# Altium PCB PCB1.PcbDoc
Units mm, origin at the board's own origin, x right, y up, seen from the top; angles counter-clockwise.
Board outline 43.05 x 44.07 mm, 4 copper layers (SIGNAL, GND, POWER, SIGNAL II), stack 0.603 mm thick; 62 components, 41 nets, 254 pads, 28 vias.
Unrouted connection lines stored in the file: 72.
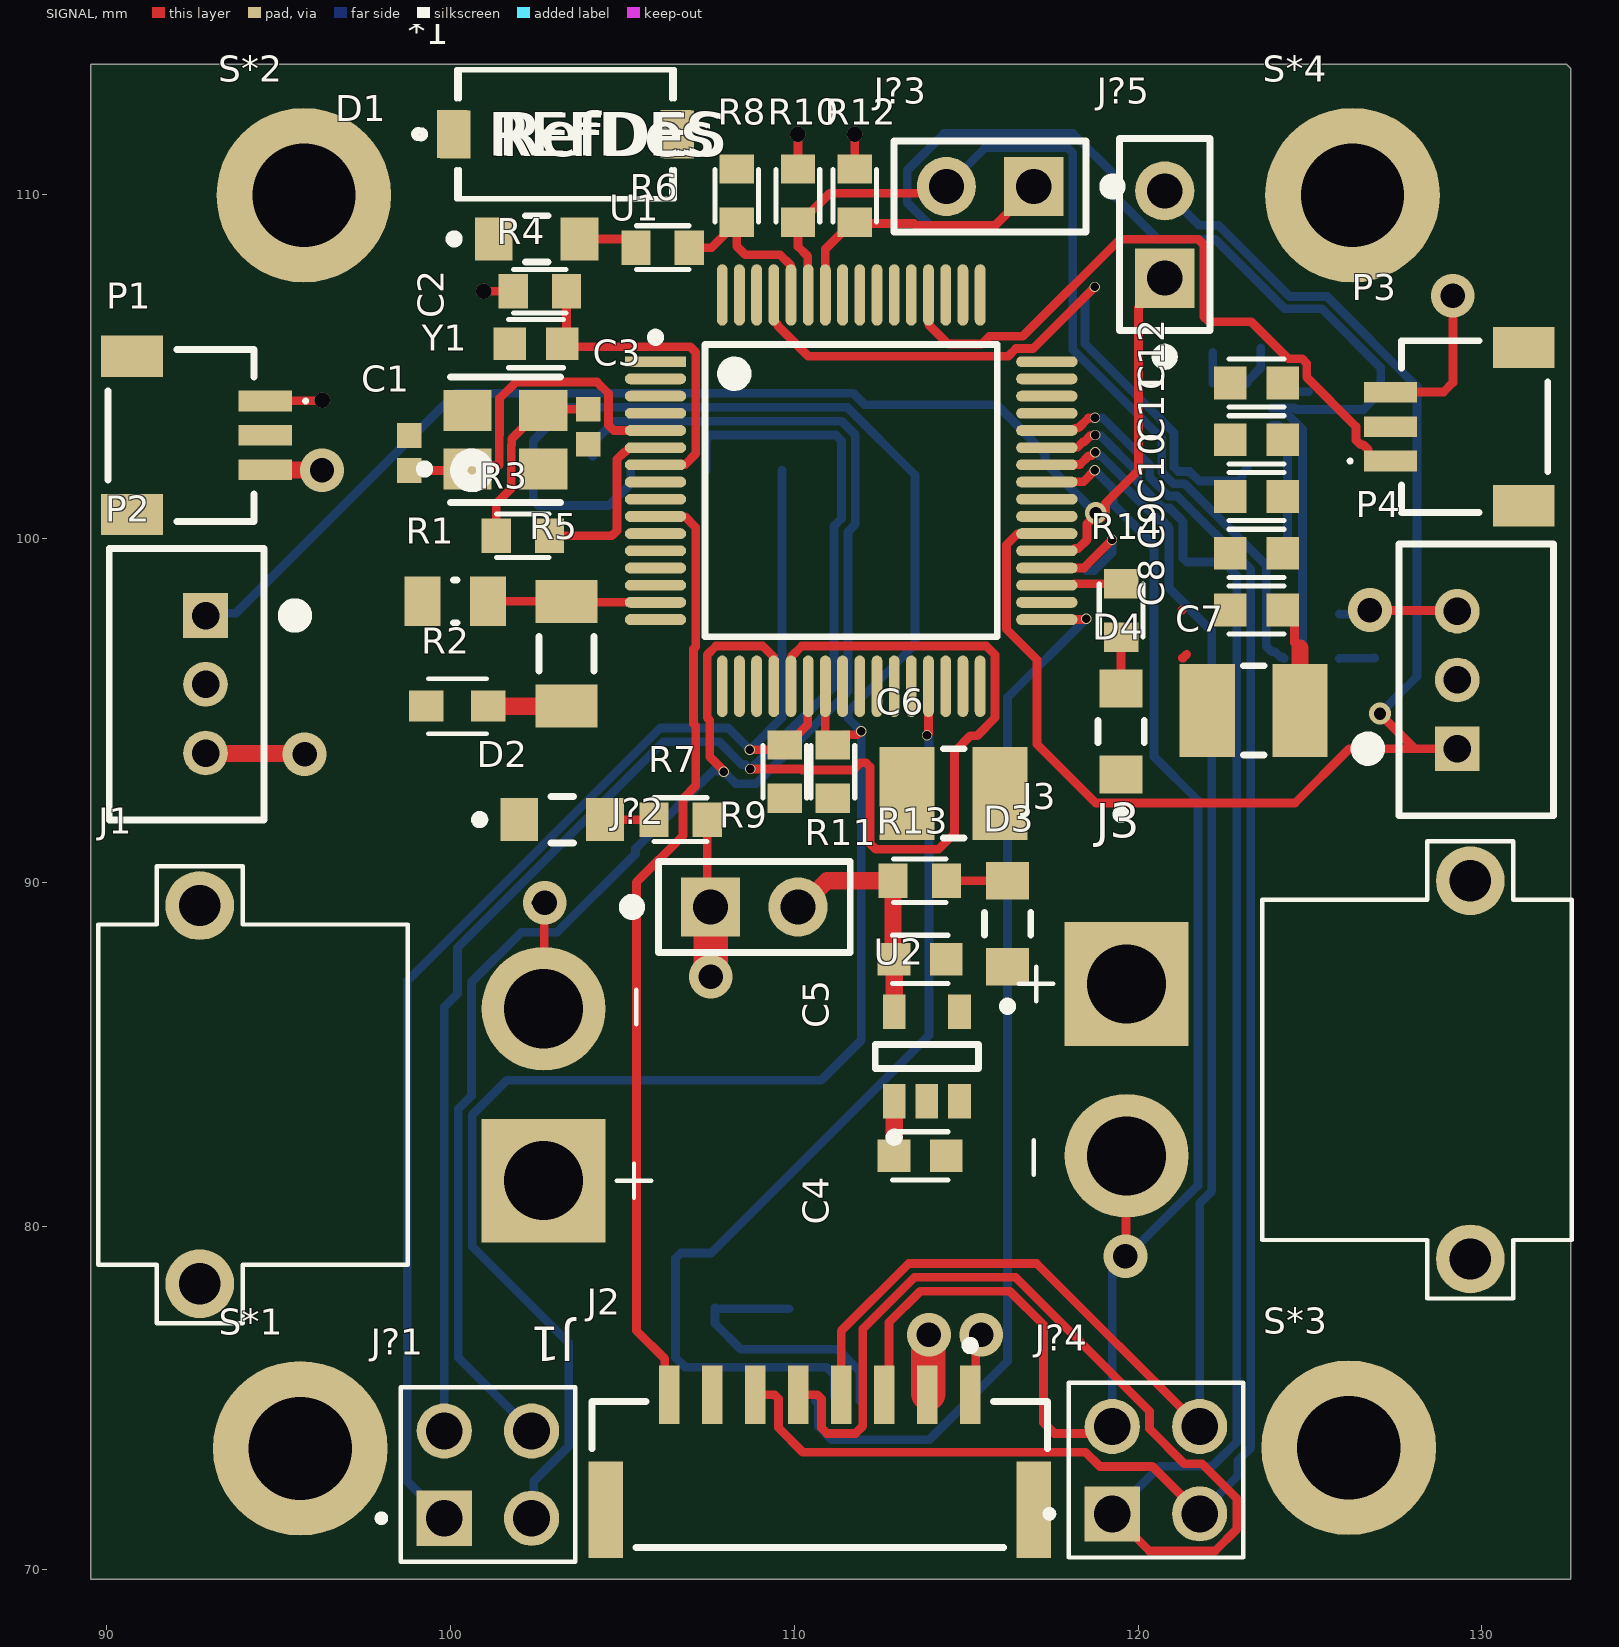
[diagram p0: SIGNAL view]
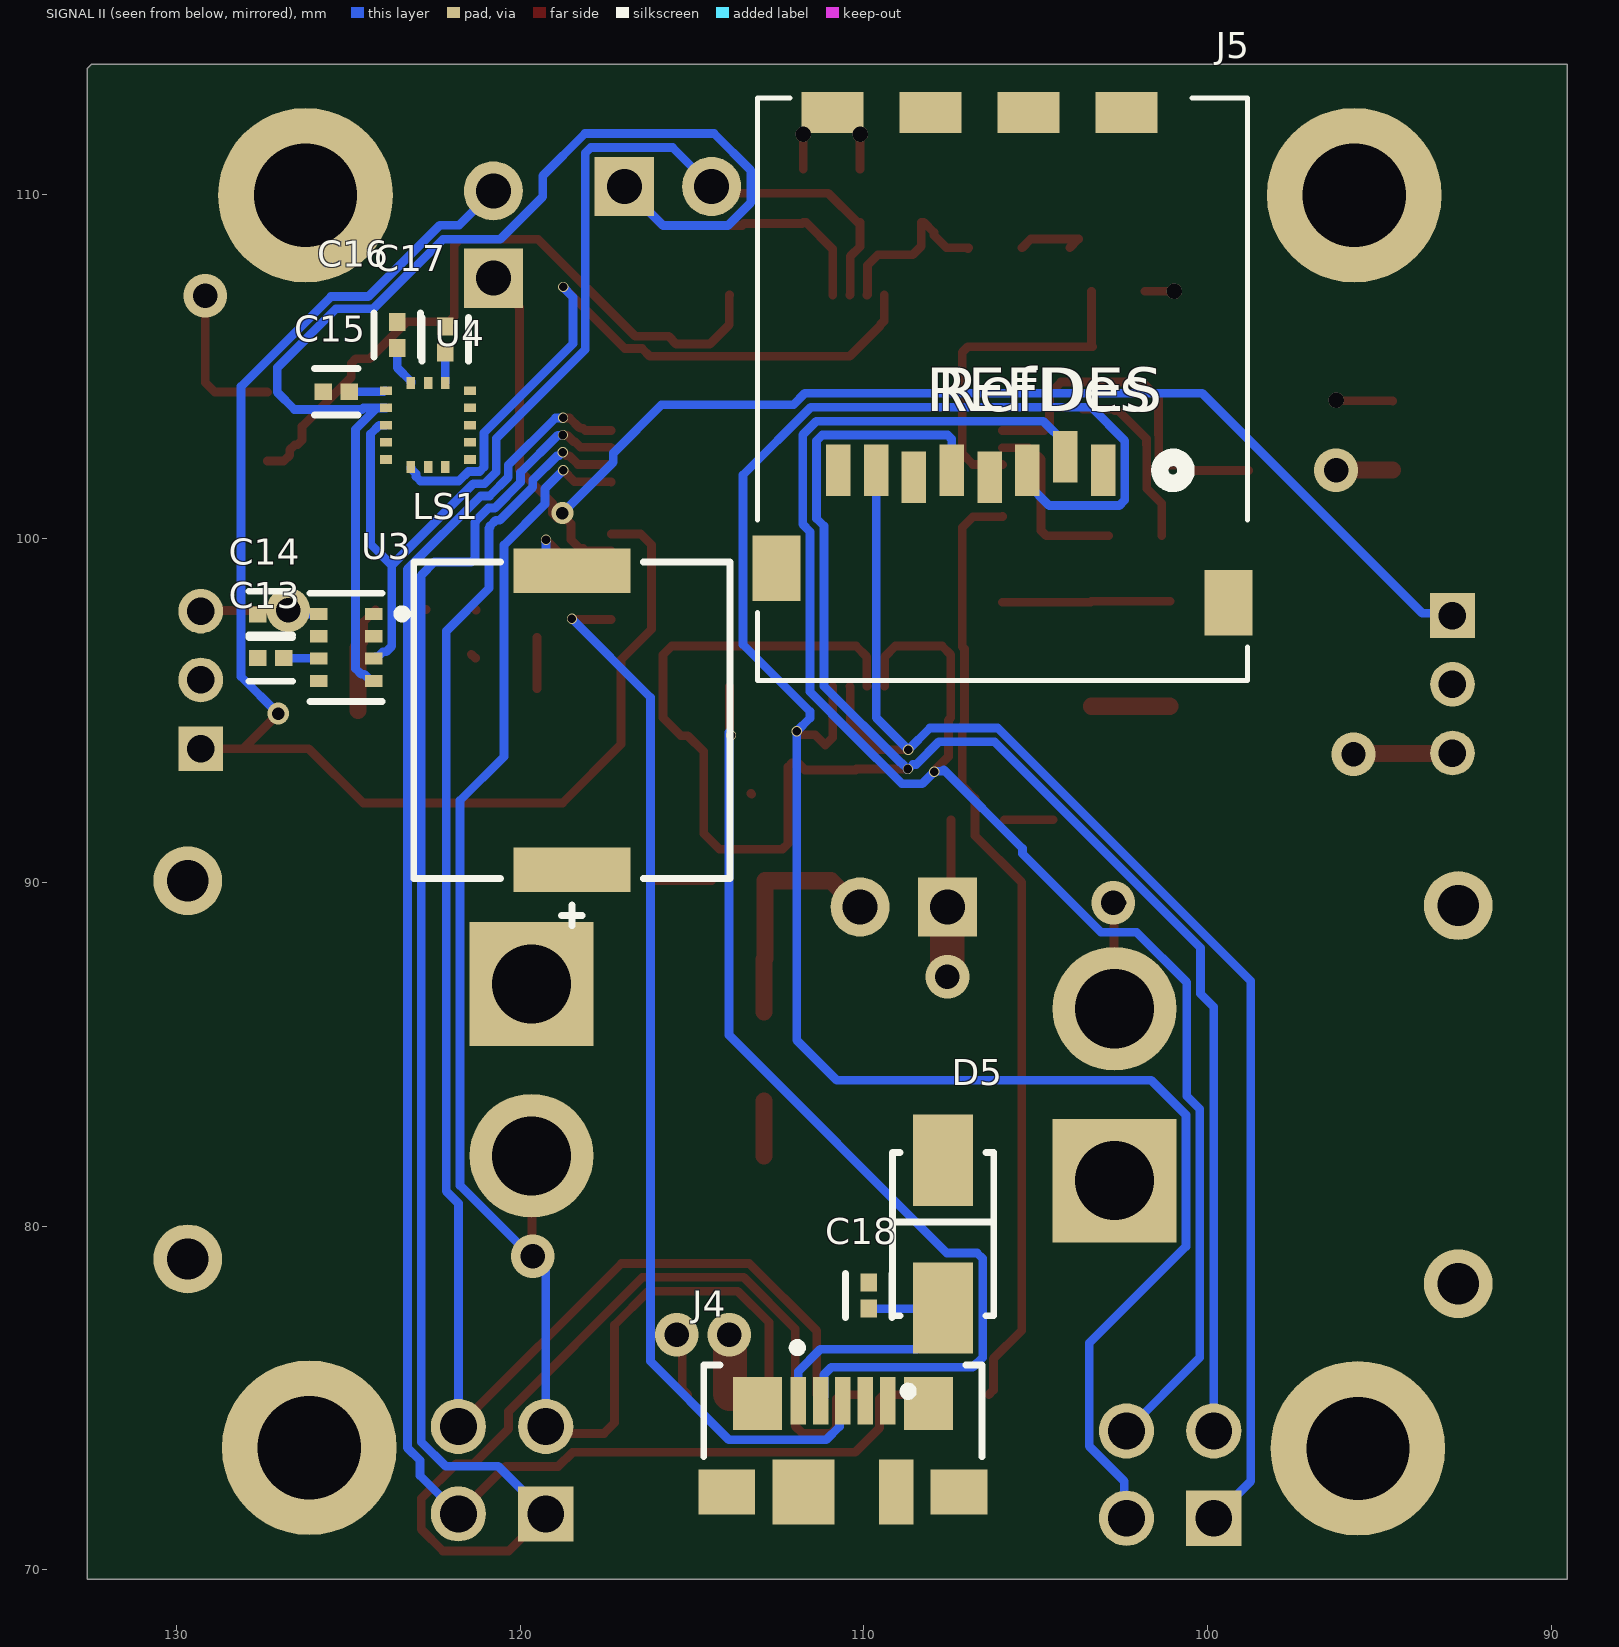
[diagram p1: SIGNAL II view, seen from below]
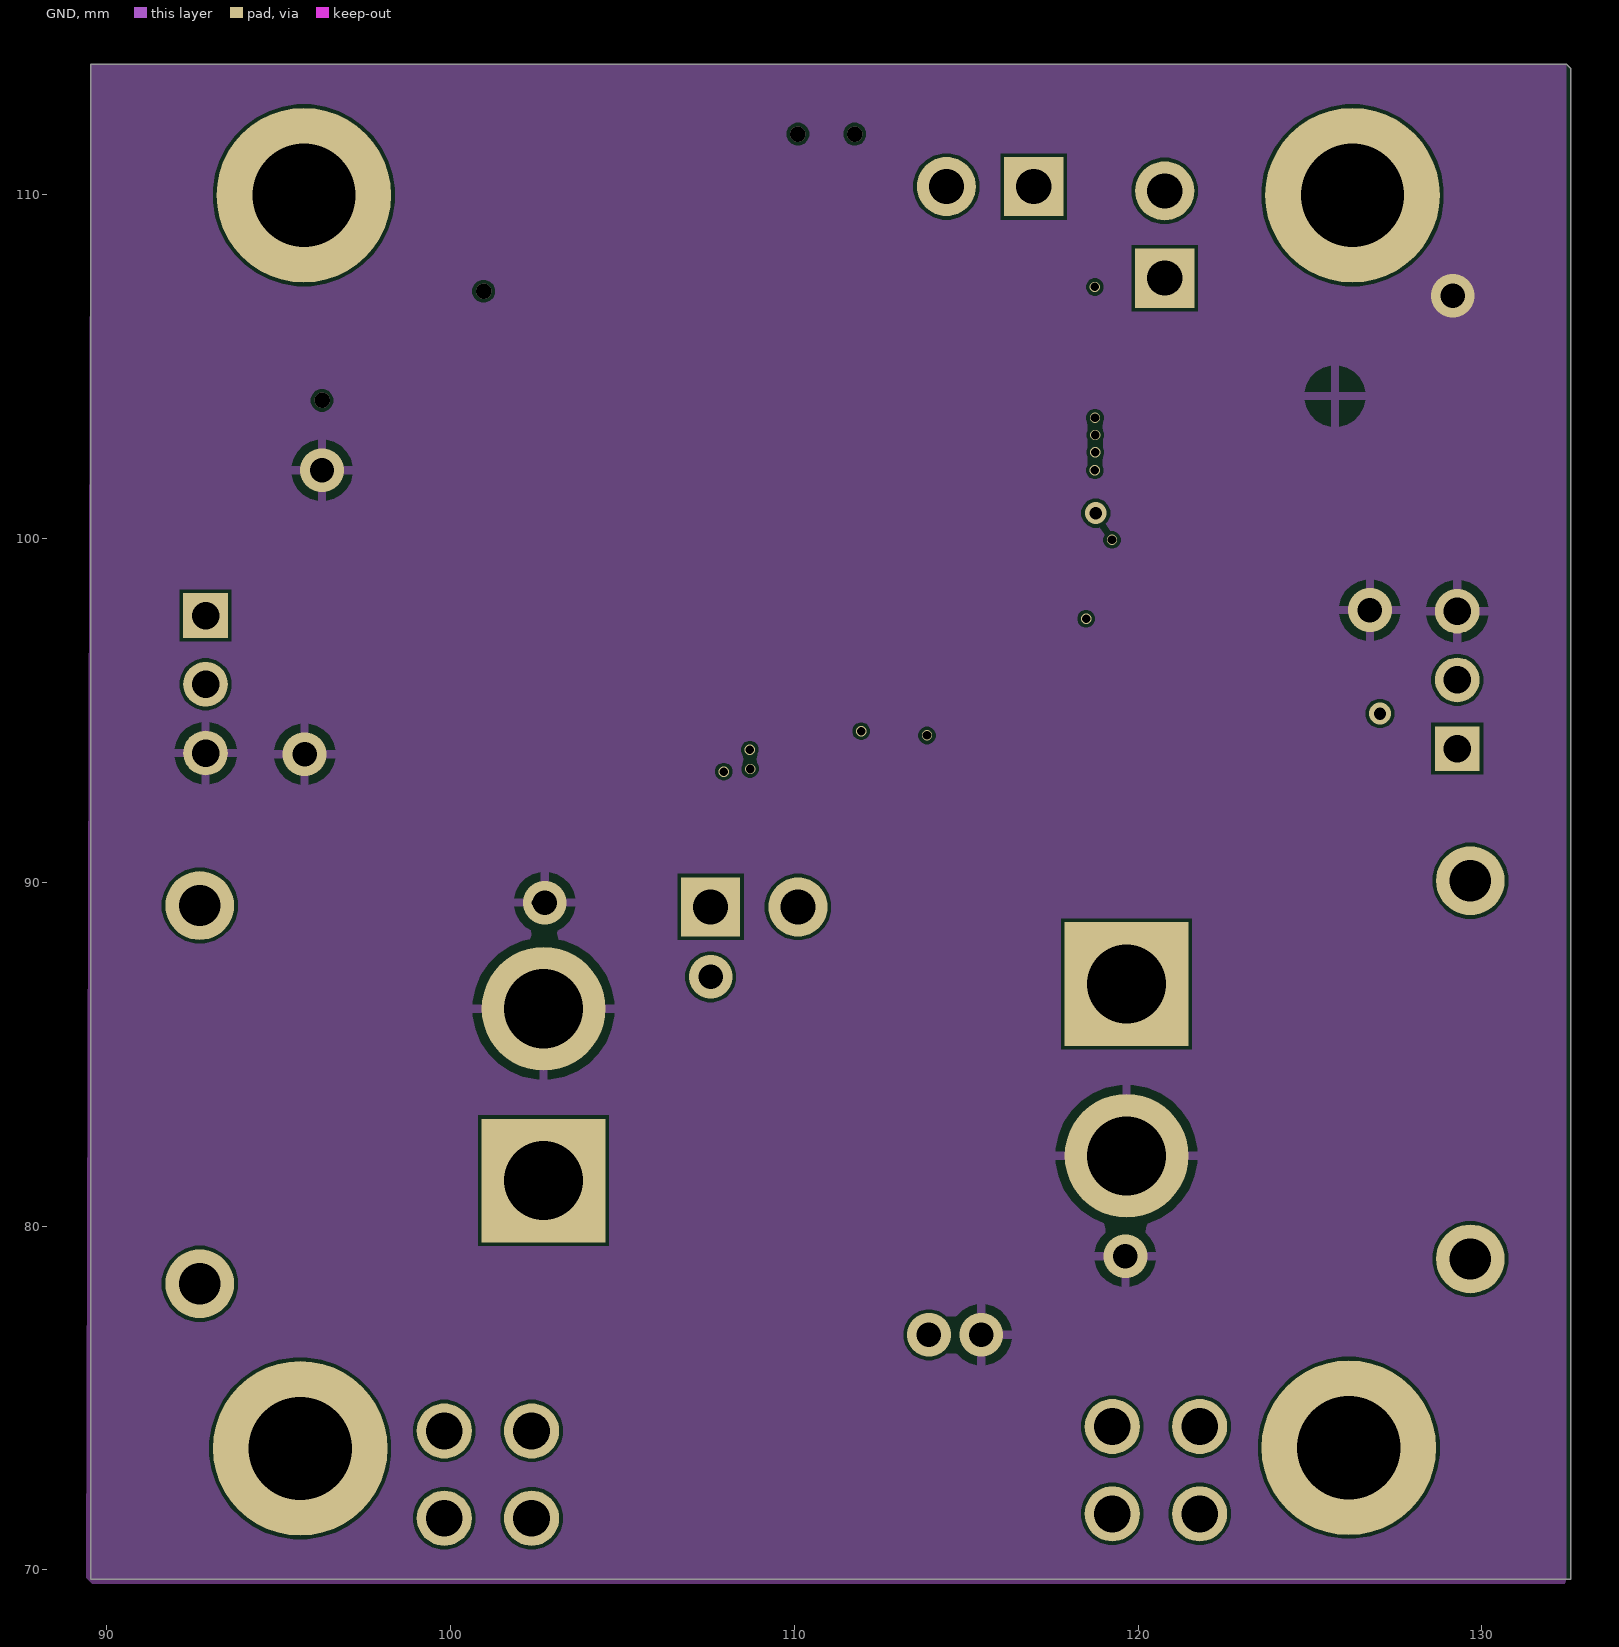
[diagram p2: GND]
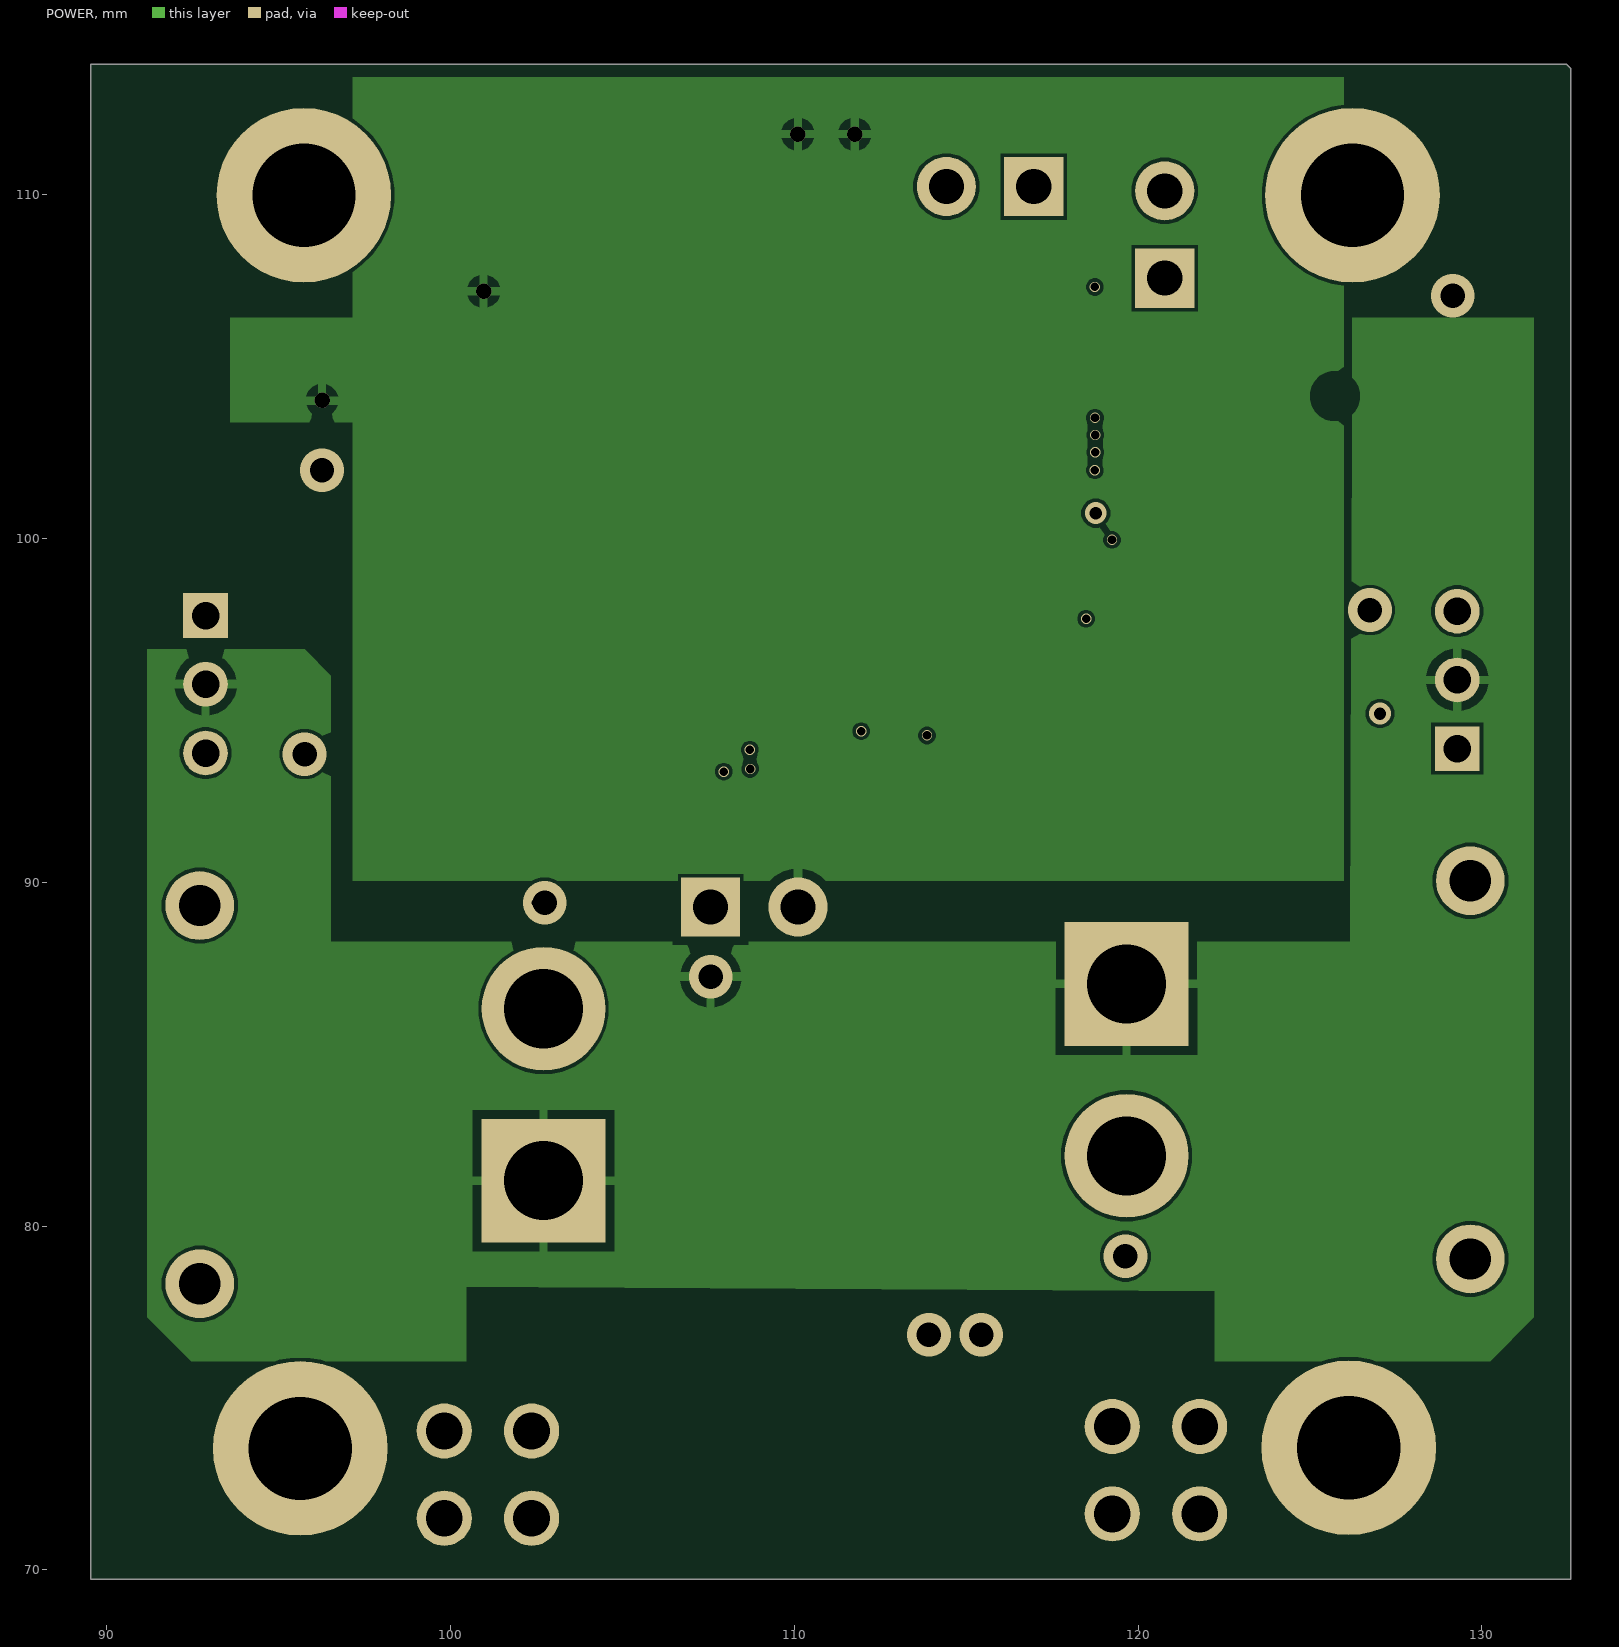
[diagram p3: POWER]

## Layer stack, top to bottom
Top Solder: solder mask 0.0102, Solder Resist, Dk 3.5
SIGNAL: signal copper 0.0356
Dielectric 2: prepreg 0.0711, PP-006, Dk 4.1
GND: signal copper 0.035
Dielectric 1: dielectric 0.32, FR-4, Dk 4.8
POWER: signal copper 0.035
Dielectric 3: prepreg 0.0711, PP-006, Dk 4.1
SIGNAL II: signal copper 0.0356
Bottom Solder: solder mask 0.0102, Solder Resist, Dk 3.5

## Board outline
89.535,113.792 132.461,113.792 132.588,113.665 132.588,69.723 89.535,69.723

## Design rules (kind name [scope] priority, off if disabled: settings)
Clearance Clearance_1 [(ExistsOnLayer('GND') Or ExistsOnLayer('POWER')) vs (ExistsOnLayer('GND') Or ExistsOnLayer('POWER'))] p1: gap=0.1 ignorepadtopadclearanceinfootprint=FALSE sourcerule=37 cellrowname=All cellrowtype=0 cellcolname=All cellcoltype=0 innerlayers=TRUE
Clearance Clearance_2 [(ExistsOnLayer('SIGNAL') Or ExistsOnLayer('SIGNAL II')) vs (ExistsOnLayer('SIGNAL') Or ExistsOnLayer('SIGNAL II'))] p2: gap=0.1 ignorepadtopadclearanceinfootprint=FALSE sourcerule=37 cellrowname=All cellrowtype=0 cellcolname=All cellcoltype=0 outerlayers=TRUE
Clearance [All] p3: gap=0.254 ignorepadtopadclearanceinfootprint=FALSE ismatrix=TRUE
PolygonConnect [All] p1: connectstyle=Relief reliefconductorwidth=0.254 reliefentries=4 polygonreliefangle="90 Angle" airgapwidth=0.254
RoutingVias [All] p1: holewidth=0.711 width=1.27 viastyle="Through Hole" minholewidth=0.711 minwidth=1.27 maxholewidth=0.711 maxwidth=1.27
SolderMaskExpansion [All] p1: expansion=0.102 istentingtop=FALSE
Width MaxMinWidth_1 [All] p1: maxlimit=1 minlimit=0.254 preferedwidth=0.254 minimp=50.000000 maximp=50.000000 favimp=50.000000
Width [All] p2: maxlimit=0.254 minlimit=0.254 preferedwidth=0.254
30 further rules are at their usual default settings.

## Classes and differential pairs
component class Power: C9 C13 C18 D2 D4 D5 J1 R5 R7 R9 R11 R13 R14 U4
component class MCU: *1 C1 C7 C9 C10 C13 D4 LS1 R3 R8 R9 R10 R11 R12 R14 S*2 S*3 S*4 U1 Y1
component class Sensors: C9 C13 C14 C16 U4
component class Connectors: J2 J5 P1 P3 P4

## Components (designator, comment, footprint, x,y, rotation, side; value= is the part's Value field where it differs from the comment)
*1 "PTS636 SM50J SMTR LFS" "PTS636 SM50J SMTR LFS-Footprint-1" 110.542,144.907 r0 top (schematic designator *)
C1 "10pF" CAPC1005X55X25ML05T05 98.806,102.487 r90 top
C2 "100nF" CAP_0603 102.489,105.664 r180 top (schematic designator C10)
C3 "10pF" CAPC1005X55X25ML05T05 104.013,103.249 r270 top (schematic designator C2)
C4 "1uF" CAP_0603 113.665,82.042 r0 top (schematic designator C16)
C5 "1uF" CAP_0603 113.665,87.757 r0 top (schematic designator C17)
C6 "2.2uF" CAP_1210 114.634,92.583 r0 top (schematic designator C9)
C7 "10uF" CAP_1210 123.364,94.996 r180 top (schematic designator C3)
C8 "100nF" CAP_0603 123.444,97.917 r180 top (schematic designator C4)
C9 "100nF" CAP_0603 123.444,99.568 r180 top (schematic designator C5)
C10 "100nF" CAP_0603 123.444,101.219 r180 top (schematic designator C6)
C11 "100nF" CAP_0603 123.444,102.87 r180 top (schematic designator C7)
C12 "100nF" CAP_0603 123.444,104.521 r180 top (schematic designator C8)
C13 "100nF" FP-CL93-IPC_C 127.254,96.52 r0 bottom (schematic designator C12)
C14 "100nF" FP-CL93-IPC_C 127.252,97.79 r0 bottom
C15 "100nF" FP-CL93-IPC_C 125.347,104.267 r180 bottom (schematic designator C13)
C16 "100nF" FP-CL93-IPC_C 123.571,105.918 r90 bottom (schematic designator C15)
C17 "100nF" FP-CL93-IPC_C 122.174,105.789 r90 bottom (schematic designator C11)
C18 "100nF" FP-CL93-IPC_C 109.855,77.98 r90 bottom
D1 "LTST-C171KGKT" FP-LTST-C171KGKT-MFG 102.509,108.712 r0 top (schematic designator D4)
D2 "LTST-C171KGKT" FP-LTST-C171KGKT-MFG 103.251,91.821 r0 top (schematic designator D3)
D3 "LTST-C171KGKT" FP-LTST-C171KGKT-MFG 116.205,88.793 r90 top (schematic designator D5)
D4 "LTST-C171KGKT" FP-LTST-C171KGKT-MFG 119.507,94.381 r90 top (schematic designator D1)
D5 "SCHOTTKY_40Vrm_1A_500mV" FP-403AE-MFG 107.696,79.765 r90 bottom (schematic designator D2)
J1 "XT30PW-M" AMASS_XT30PW-M 92.71,83.82 r90 top (schematic designator J4)
J2 "BM08B-GHS-TBT(LF)(SN)" FP-BM08B-GHS-TBT_LF_SN-MFG 110.744,72.771 r0 top
J3 "XT30PW-M" AMASS_XT30PW-M 129.667,84.543 r270 top (schematic designator J5)
J4 "473460001" FP-473460001-MFG 110.61,72.613 r180 bottom (schematic designator J1)
J5 "112A-TAAR-R03" CONN8_-TAAR-R03_ATT 103.042,101.981 r180 bottom (schematic designator J3)
J?1 "Harwin-M20-9980245" HARWIN_M20-9980245 101.092,72.771 r0 top (schematic designator J?)
J?2 "Harwin-M20-9990246" HARWIN_M20-9990246 108.839,89.281 r0 top (schematic designator J?)
J?3 "Harwin-M20-9990246" HARWIN_M20-9990246 115.697,110.236 r180 top (schematic designator J?)
J?4 "Harwin-M20-9980245" HARWIN_M20-9980245 120.523,72.898 r0 top (schematic designator J?)
J?5 "Harwin-M20-9990246" HARWIN_M20-9990246 120.777,108.839 r90 top (schematic designator J?)
LS1 "PKMCS0909E4000-R1" FP-PKMCS-MFG 118.491,94.71 r270 bottom
P1 "SM03B-SRSS-TB(LF)(SN)" JST-SM03B-SRSS-TB_V 92.165,102.997 r270 top (schematic designator P4)
P2 "B3B-PH-K-S(LF)(SN)" JST-B3B-PH-K-S-3_V 92.329,95.758 r270 top (schematic designator P1)
P3 "SM03B-SRSS-TB(LF)(SN)" JST-SM03B-SRSS-TB_V 129.794,103.251 r90 top
P4 "B3B-PH-K-S(LF)(SN)" JST-B3B-PH-K-S-3_V 129.836,95.885 r90 top (schematic designator P2)
R1 "5K" RESC2013X83X38NL15T13 100.142,98.171 r0 top (schematic designator R9)
R2 "" RNCF0603_MFG 100.203,95.123 r0 top (schematic designator R10)
R3 "0R" RES_0603 102.108,100.076 r180 top
R4 "10k" RES_0603 102.603,107.188 r180 top value=10kR (schematic designator R7)
R5 "3K" RESC3116X65X40ML10T20 103.378,96.646 r90 top (schematic designator R11)
R6 "RES_1k_1%_0.1W_0603" RES_0603 106.172,108.458 r180 top value=1kR (schematic designator R13)
R7 "RES_2.2k_1%_0.1W_0603" RES_0603 106.693,91.821 r180 top value=2.2kR (schematic designator R12)
R8 "10k" RES_0603 108.331,109.969 r270 top value=10kR
R9 "10k" RES_0603 109.728,93.218 r270 top value=10kR (schematic designator R1)
R10 "4.7K" RES_0603 110.109,109.969 r90 top (schematic designator R5)
R11 "10k" RES_0603 111.125,93.218 r270 top value=10kR (schematic designator R2)
R12 "4.7K" RES_0603 111.76,109.969 r90 top (schematic designator R4)
R13 "RES_1k_1%_0.1W_0603" RES_0603 113.652,90.043 r0 top value=1kR (schematic designator R14)
R14 "1k" RES_0603 119.507,97.904 r270 top value=1kR (schematic designator R6)
S*1 "M3_HOLE" "M3 Screw Hole Footprint" 95.631,73.533 r0 top (schematic designator S*4)
S*2 "M3_HOLE" "M3 Screw Hole Footprint" 95.738,109.982 r0 top
S*3 "M3_HOLE" "M3 Screw Hole Footprint" 126.131,73.553 r0 top
S*4 "M3_HOLE" "M3 Screw Hole Footprint" 126.238,109.982 r0 top (schematic designator S*1)
U1 "STM32F722RET6" FP-LQFP64-5W-IPC_A 111.657,101.39 r0 top
U2 "MIC5504-3.3YM5-TR" FP-SOT23-5LD-PL-1-MFG 113.858,84.933 r90 top (schematic designator U4)
U3 "BMP280" FP-BMP280-MFG 125.057,96.83 r180 bottom (schematic designator U2)
U4 "ICM-20602" INSE-I62-16 122.674,103.296 r180 bottom (schematic designator U3)
Y1 "ABM8G-16.000MHZ-18-D2Y-T" FP-ABM8G-MFG 101.6,102.87 r0 top

## Footprints (in the part's own frame and the unit in brackets; to place one, negate y for a bottom-side part, rotate by r counter-clockwise, add the part's x,y. Pads: shape width x height; smd on the part's side, far side on the other; paste and mask are expansions set on the pad)
AMASS_XT30PW-M [mm]
  rect 3.6x3.6 hole 2.3: 1(-2.5,-10)
  round 3.6 hole 2.3: 2(2.5,-10)
  round 2 hole 1.2: ""(-5.5,0) ""(5.5,0)
  silkscreen extent -6.65,-13.13 6.65,2.95, body extent -6.65,-11 6.65,2.95, height 5
CAP_0603 [mm] "Chip Capacitor, 2-Leads, Body 1.60x0.80mm, IPC Medium Density"
  rect 0.95x0.95 smd mask+0.05: 1(-0.762,0) 2(0.762,0)
  silkscreen extent -0.8,-0.7 0.8,0.7, body extent -0.85,-0.45 0.85,0.45, height 0.9
CAP_1210 [mm] "Chip Capacitor, 2-Leads, Body 3.25x2.50mm, IPC Medium Density"
  rect 1.6x2.7 smd: 1(-1.35,0) 2(1.35,0)
  silkscreen extent -0.3,-1.3 0.3,1.3, body extent -1.6,-1.35 1.6,1.35, height 2.49
CAPC1005X55X25ML05T05 [mm] "Chip Capacitor, 2-Leads, Body 1.00x0.50mm, IPC Low Density"
  rect 0.72x0.72 smd: 1(-0.51,0) 2(0.51,0)
  body extent -0.53,-0.28 0.53,0.27, height 0.55
CONN8_-TAAR-R03_ATT [mil]
  rect 28x59 smd paste+0 mask+0: 1(0,0) 2(-43.31,15.75) 3(-86.61,0) 4(-129.92,-7.87) 5(-173.23,0) 6(-216.54,-7.87) 7(-259.84,0) 8(-303.15,0)
  rect 71x47 smd paste-35.5 mask-35.5: 9(26.61,409.61) 10(-85.59,409.61) 11(-197.8,409.61) 12(-310,409.61)
  rect 55x75 smd paste-37.5 mask-37.5: 13(143.78,-151.65) 14(-373.94,-112.28)
  silkscreen extent -396,-241 165,426
FP-403AE-MFG [mm]
  rect 2.65x1.75 smd paste+0 mask+0: 1(-2.15,0) 2(2.15,0)
  silkscreen extent -4.7,-1.48 2.37,1.48, body extent -2.6,-1.36 2.6,1.36, height 2.5
FP-473460001-MFG [mm]
  rect 0.45x1.38 smd paste+0 mask+0: 1(-1.3,2.31) 2(-0.65,2.31) 3(0,2.31) 4(0.65,2.31) 5(1.3,2.31)
  rect 1.425x1.55 smd paste+0 mask+0: 6(-2.488,2.225) 7(2.488,2.225)
  rect 1.65x1.3 smd paste+0 mask+0: 8(-3.375,-0.35) 11(3.375,-0.35)
  rect 1.8x1.9 smd paste+0 mask+0: 9(-1.15,-0.35)
  rect 1x1.9 smd paste+0 mask+0: 10(1.55,-0.35)
  silkscreen extent -4.05,0.67 4.05,3.97, body extent -3.99,-2.93 3.99,2.5, height 2.98
FP-ABM8G-MFG [mm]
  rect 1.4x1.2 smd paste+0 mask+0: 1(-1.1,-0.85) 2(1.1,-0.85) 3(1.1,0.85) 4(-1.1,0.85)
  silkscreen extent -2.47,-1.83 1.6,1.83, body extent -1.9,-1.55 1.9,1.55, height 0.25
FP-BM08B-GHS-TBT_LF_SN-MFG [mm]
  rect 0.6x1.7 smd paste+0 mask+0: 1(4.375,2.325) 2(3.125,2.325) 3(1.875,2.325) 4(0.625,2.325) 5(-0.625,2.325) 6(-1.875,2.325) 7(-3.125,2.325) 8(-4.375,2.325)
  rect 1x2.8 smd paste+0 mask+0: 9(-6.225,-1.025) 10(6.225,-1.025)
  silkscreen extent -6.63,-2.12 6.63,3.87, body extent -6.83,-2.52 6.83,3.27, height 0.25
FP-BMP280-MFG [mm]
  rect 0.5x0.35 smd paste+0 mask+0: 1(0.8,0.975) 2(0.8,0.325) 3(0.8,-0.325) 4(0.8,-0.975) 5(-0.8,-0.975) 6(-0.8,-0.325) 7(-0.8,0.325) 8(-0.8,0.975)
  silkscreen extent -1.05,-1.58 1.75,1.58, body extent -1,-1.25 1,1.25, height 1
FP-CL93-IPC_C [mm]
  rect 0.515x0.472 smd paste+0 mask+0: 1(-0.379,0) 2(0.379,0)
  silkscreen extent -0.64,-0.67 0.64,0.67, body extent -0.5,-0.25 0.5,0.25, height 0.55
FP-LQFP64-5W-IPC_A [mm]
  rect 1.788x0.312 smd paste+0 mask+0: 1(-5.691,3.75)
  rrect100% 1.788x0.312 smd paste+0 mask+0: 2(-5.691,3.25) 3(-5.691,2.75) 4(-5.691,2.25) 5(-5.691,1.75) 6(-5.691,1.25) 7(-5.691,0.75) 8(-5.691,0.25) 9(-5.691,-0.25) 10(-5.691,-0.75) 11(-5.691,-1.25) 12(-5.691,-1.75) 13(-5.691,-2.25) 14(-5.691,-2.75) 15(-5.691,-3.25) 16(-5.691,-3.75) 33(5.691,-3.75) 34(5.691,-3.25) 35(5.691,-2.75) 36(5.691,-2.25) 37(5.691,-1.75) 38(5.691,-1.25) 39(5.691,-0.75) 40(5.691,-0.25) 41(5.691,0.25) 42(5.691,0.75) 43(5.691,1.25) 44(5.691,1.75) 45(5.691,2.25) 46(5.691,2.75) 47(5.691,3.25) 48(5.691,3.75)
  rrect100% 0.312x1.788 smd paste+0 mask+0: 17(-3.75,-5.691) 18(-3.25,-5.691) 19(-2.75,-5.691) 20(-2.25,-5.691) 21(-1.75,-5.691) 22(-1.25,-5.691) 23(-0.75,-5.691) 24(-0.25,-5.691) 25(0.25,-5.691) 26(0.75,-5.691) 27(1.25,-5.691) 28(1.75,-5.691) 29(2.25,-5.691) 30(2.75,-5.691) 31(3.25,-5.691) 32(3.75,-5.691) 49(3.75,5.691) 50(3.25,5.691) 51(2.75,5.691) 52(2.25,5.691) 53(1.75,5.691) 54(1.25,5.691) 55(0.75,5.691) 56(0.25,5.691) 57(-0.25,5.691) 58(-0.75,5.691) 59(-1.25,5.691) 60(-1.75,5.691) 61(-2.25,5.691) 62(-2.75,5.691) 63(-3.25,5.691) 64(-3.75,5.691)
  silkscreen extent -5.82,-4.25 4.25,4.58, body extent -7.09,-7.09 7.09,7.09, height 0.25
FP-LTST-C171KGKT-MFG [mm]
  rect 1.1x1.25 smd paste+0 mask+0: 1(-1.25,0) 2(1.25,0)
  silkscreen extent -2.52,-0.67 0.33,0.67, body extent -1.9,-0.77 1.9,0.77, height 0.25
FP-PKMCS-MFG [mm]
  rect 1.3x3.4 smd paste+0 mask+0: 1(-4.35,0) 2(4.35,0)
  silkscreen extent -4.6,-4.6 5.97,4.6, body extent -4.5,-4.5 4.5,4.5, height 1.9
FP-SOT23-5LD-PL-1-MFG [mm]
  rect 1x0.66 smd paste+0 mask+0: 1(-1.3,0.95) 2(-1.3,0) 3(-1.3,-0.95) 4(1.3,-0.95) 5(1.3,0.95)
  silkscreen extent -2.47,-1.5 0.35,1.5, body extent -1.4,-1.45 1.4,1.45, height 1.45
HARWIN_M20-9980245 [mm]
  rect 1.605x1.605 / inner round 1.605 / far side rect 1.605x1.605 hole 1.07: 1(-1.27,-1.27)
  round 1.605 hole 1.07: 2(-1.27,1.27) 3(1.27,-1.27) 4(1.27,1.27)
  silkscreen extent -3.2,-2.54 2.54,2.54, body extent -2.54,-2.54 2.54,2.54, height 8.65
HARWIN_M20-9990246 [mm]
  rect 1.72x1.72 hole 1.02 paste-2539.97 mask+0: 1(-1.27,0)
  round 1.72 hole 1.02 paste-2539.97 mask+0: 2(1.27,0)
  silkscreen extent -3.81,-1.32 2.79,1.32, body extent -2.89,-1.42 2.89,1.42, height 0.25
INSE-I62-16 [mm] "LGA, 16-Leads, Body 3x3mm, Pitch 0.5mm"
  rect 0.35x0.25 smd: 1(-1.225,1) 2(-1.225,0.5) 3(-1.225,0) 4(-1.225,-0.5) 5(-1.225,-1) 9(1.225,-1) 10(1.225,-0.5) 11(1.225,0) 12(1.225,0.5) 13(1.225,1)
  rect 0.25x0.35 smd: 6(-0.5,-1.225) 7(0,-1.225) 8(0.5,-1.225) 14(0.5,1.225) 15(0,1.225) 16(-0.5,1.225)
  body extent -1.5,-1.5 1.5,1.5, height 0.8
JST-B3B-PH-K-S-3_V [mm] "Connector, 3-Leads, Body 7.9x4.5mm, Pitch 2mm"
  rect 1.3x1.3 hole 0.8: 1(-2,0.55)
  round 1.3 hole 0.8: 2(0,0.55) 3(2,0.55)
  silkscreen extent -3.95,-2.25 3.95,3.4, body extent -3.95,-2.25 3.95,2.25, height 6
JST-SM03B-SRSS-TB_V [mm] "SMD, 3-Leads, Body 5x4.25mm, Pitch 1mm"
  rect 0.6x1.55 smd: 1(-1,2.45) 2(0,2.45) 3(1,2.45)
  rect 1.2x1.8 smd: MP1(-2.3,-1.425) MP2(2.3,-1.425)
  silkscreen extent -2.5,-2.12 2.5,3.67, body extent -2.5,-2.12 2.5,2.83, height 3.25
"M3 Screw Hole Footprint" [mm]
  round 5.08 hole 3: 0(0,0)
"PTS636 SM50J SMTR LFS-Footprint-1" [mil]
  rect 35x55 smd paste+0 mask+0: 1(-412.95,-1305) 1(-409.49,-1305.25) 2(-157.05,-1305) 2(-153.58,-1305.25)
  silkscreen extent -457,-1379 -159,-1231, body extent -403,-1374 -164,-1236, height 169
RES_0603 [mm] "Chip Resistor, 2-Leads, Body 1.60x0.80mm, IPC Medium Density"
  rect 0.85x1 smd mask+0.05: 1(-0.775,0) 2(0.775,0)
  silkscreen extent -0.76,-0.64 0.76,0.64, body extent -0.8,-0.4 0.8,0.4, height 0.53
RESC2013X83X38NL15T13 [mm] "Chip Resistor, 2-Leads, Body 2.03x1.27mm, IPC Medium Density"
  rect 1.05x1.45 smd: 1(-0.95,0) 2(0.95,0)
  silkscreen extent -0.05,-0.63 0.05,0.63, body extent -1.09,-0.71 1.09,0.71, height 0.83
RESC3116X65X40ML10T20 [mm] "Chip Resistor, 2-Leads, Body 3.10x1.60mm, IPC Low Density"
  rect 1.25x1.8 smd: 1(-1.525,0) 2(1.525,0)
  silkscreen extent -0.5,-0.8 0.5,0.8, body extent -1.6,-0.85 1.6,0.85, height 0.65
RNCF0603_MFG [mm] "Recommended Land Pattern"
  rect 1x0.9 smd: 1(-0.9,0) 2(0.9,0)
  silkscreen extent -0.85,-0.8 0.85,0.8, body extent -0.77,-0.4 0.77,0.4, height 0.55

## Part data
*1: library part CMP-00098-1, "Switch Tactile N.O. SPST Rectangular Button J-Bend 0.05A 12VDC 1.77N SMD T/R", Color=Black, Contact Resistance=100mΩ, Insulation Resistance=100MΩ, Max Current Rating=50mA, Max Operating Temperature=90°C, Max Voltage Rating (DC)=12V, Min Operating Temperature=-40°C, Operating Force=2.26N, Electrical Life=50kcycles, Height=3.25mm, Length=6mm, Lifecycle Status=Production, Number of Positions=1, REACH SVHC=Yes, RoHS=Compliant, Sealable=IP40, Throw Configuration=SPST
C1 C3: library part CMP-2100-03589-1, "Chip Capacitor, 10 pF, +/- 5%, 50 V, -55 to 125 degC, 0402 (1005 Metric), RoHS, Tape and Reel", Case Code (Imperial)=0402, Case Code (Metric)=1005, Dielectric=C0G, Dielectric Material=Ceramic, Insulation Resistance=100GR, Manufacturer=Yageo, Max Operating Temperature=125degC, Min Operating Temperature=-55degC, Package Description="2-Pin Surface Mount Device, Body 1 x 0.5 mm", Package Quantity=1, Temperature Coefficient=30ppm/degC, Tolerance=5%, Voltage=50V, Capacitance=10pF, Case/Package=0402, Composition=Ceramic, Datasheet URL=http://www.yageo.com/documents/recent/UPY-GP_NP0_16V-to-50V_14.pdf, Datasheet Version="Rev. 14, 07/2016", Depth=0.5mm, Height=0.5mm, Lead Free=LeadFree, Length=1mm, Manufacturer URL=http://www.yageo.com/, Mount=SurfaceMount, Number of Pins=2, Package Reference=0402, Packaging=TapeandReel, Radiation Hardening=No, REACH SVHC=NoSVHC, RoHSCompliant=True, Termination=SMD/SMT, Thickness=0.022inch, Voltage Rating=50V, Voltage Rating (DC)=50V, Width=0.02inch
C2 C8 C9 C10 C11 C12: library part CMP-097-000004-12, "CAP CER 0.1UF 50V X7R 0603", Capacitor Type=Ceramic, Case/Package=0603, JLCPCB Part No.=C14663, Max Operating Temperature=125°C, Min Operating Temperature=-55°C, Package Shape=Rectangular, Package Style=SMTMeter, Rated DC Voltage (URdc)=50V, Temperature Characteristics Code=X7R, Tolerance  (fill in as +-)=10%, Dielectric Material=Ceramic, Height=0.8mm, JESD-609 Code=e3, Length=1.6mm, Mounting Technology="Surface Mount", Multilayer=Yes, Packaging="Tape and Reel", Pins=2, Reach SVHC Compliant=Yes, RoHS Compliant=Yes, Terminal Finish=Nickel, Termination=Wraparound, Tolerance (fill in as +-)=10%, Width=0.8mm
C4 C5: library part CMP-097-000006-8, "CAP CER 1UF 50V X5R 0603", Capacitor Type=Ceramic, Case/Package=0603, JLCPCB Part No.=C15849, Max Operating Temperature=85°C, Min Operating Temperature=-55°C, Package Shape=Rectangular, Package Style=SMTMeter, Rated DC Voltage (URdc)=50V, Temperature Characteristics Code=X5R, Tolerance  (fill in as +-)=10%, Dielectric Material=Ceramic, Height=0.9mm, JESD-609 Code=e3, Length=1.6mm, Mounting Technology="Surface Mount", Multilayer=Yes, Packaging="Tape and Reel", Pins=2, Reach SVHC Compliant=Yes, RoHS Compliant=Yes, Terminal Finish=Nickel, Termination=Wraparound, Tolerance (fill in as +-)=10%, Width=0.8mm
C6: library part CMP-097-000020-5, "2.2 µF ±10% 100V Ceramic Capacitor X7R 1210 (3225 Metric)", JLCPCB Part No.=C55151
C7: library part CMP-097-000018-7, "10 µF ±10% 100V Ceramic Capacitor X7S 1210 (3225 Metric)", JLCPCB Part No.=C5596909
C13 C14 C15 C16 C17 C18: library part CMP-13271-000610-1, "Cap Ceramic 100nF 10V X7R ±10% SMD 0402 +125°C Paper T/R"
D1 D2 D3 D4: library part CMP-22017-000037-1, "LED GREEN CLEAR SMD", Case Code (Imperial)=0805, Case Code (Metric)=2012, Color=Green, Forward Current=30mA, Forward Voltage=2.4V, Lens Color=Colorless, Max Operating Temperature=85°C, Min Operating Temperature=-55°C, Package Quantity=1, Power Dissipation=75mW, Reverse Voltage=5V, Test Current=20mA, Case/Package=0805, Depth=1.25mm, Dominant Wavelength=571nm, Height=0.8mm, Illumination Color=Green, Lead Free="Lead Free", Length=2mm, Lens Style=Rectangular, Lens Transparency=Clear, Luminous Intensity=35mcd, Mount="Surface Mount", Number of Elements=1, Number of LEDs=1, Number of Pins=2, Packaging="Tape and Reel", Power Rating=75mW, Radiation Hardening=No, Viewing Angle=130°, Wavelength=574nm, Width=1.25mm
D5: library part CMP-00074-2, "SS14 Series 500 mV 1 A 40 V Max Reverse Voltage Schottky Rectifier - DO-214AC", JLCPCB Part No.=C2480
J1 J3: library part CMP-00055-6, "Power Connector", JLCPCB Part No.=C428721, Package=None, Availability="Not in stock", Check_prices=https://www.snapeda.com/parts/XT30UPB-M/AMASS/view-part/?ref=eda, Component Type=Standard, Design Item ID=XT30UPB-M, MF=amass, MP=XT30UPB-M, Pin Count=2, Price=None, SnapEDA_Link=https://www.snapeda.com/parts/XT30UPB-M/AMASS/view-part/?ref=snap, Source=XT30UPB-M.SchLib
J2: library part CMP-17439-000100-2, "CONN HEADER SMD 8POS 1.25MM", Case/Package=SMD/SMT, Current Rating=1A, Housing Color=Natural, Max Operating Temperature=85°C, Min Operating Temperature=-25°C, Voltage Rating=50V, Contact Material="Copper, Tin", Contact Plating=Tin, Height=4.2mm, Housing Material=Nylon, Lead Free="Lead Free", Lead Pitch=1.25mm, NexarPartId=289283, Number of Contacts=8, Number of Positions=8, Number of Rows=1, Orientation=Straight, Packaging="Cut Tape", Pitch=1.25mm, REACH SVHC="No SVHC", RoHS=Compliant, Termination=SMD/SMT, Voltage Rating (AC)=50V, Wire/Cable Gauge=26AWG
J4: library part CMP-2000-05246-2, "CONN RCPT USB2.0 MICRO B SMD R/A", Current Rating=1.8A, Manufacturer=Molex, Package=0, Temperature="-30°C to +85°C", Temperature Range High=+85°C, Temperature Range Low=-30°C, Voltage Rating=30V, Automotive=No, Category=Conn, ComponentLink2Description=Datasheet, ComponentLink2URL=https://www.molex.com/webdocs/datasheets/pdf/en-us/0473460001_IO_CONNECTORS.pdf, Conn Orientation="Right Angle", Contact Material=Gold,Nickel, Device Class L1=Connectors, Device Class L2="USB Connectors", Device Class L3=unset, Digikey Description="CONN RCPT USB2.0 MICRO B SMD R/A", Footprint Url=https://www.molex.com/pdm_docs/sd/473460001_sd.pdf, Height=2.945mm, Is Female=yes, Lead Free=Yes, Manufacturer Part Number=473460001, Number of Contacts=5, Octopart=https://octopart.com/47346-0001-molex-7164928, Pitch=0.65mm, RoHS=TRUE, Shielding=true, Usb Standard="USB 2.0"
J5: library part CMP-255-000000-1, Manufacturer_Name=Attend, Copyright="Copyright (C) 2025 Ultra Librarian. All rights reserved.", Design Item ID=112A-TAAR-R03, Manufacturer_Part_Number=112A-TAAR-R03, RefDes=RefDes, Source=112A-TAAR-R03.SchLib, Type=Type
J?1 J?4: library part CMP-031-000001-6, "Connector Header Through Hole 4 position 0.100\" (2.54mm)", Flammability Rating="UL94 V-0", JLCPCB Part No.=C6585845, Package=None, Availability=Unavailable, Component Type=Standard, Connector Type="BOARD CONNECTOR", Contact Finish - Mating=GOLD, Contact Finish - Termination="Gold (Au)", Contact Gender=Male, Contact Material=Brass, Design Item ID=M20-9980245, DIN Conformance=No, Filter Feature=No, IEC Conformance=No, JESD-609 Code=e4, MIL Conformance=No, Mixed Contacts=No, Mounting Style=STRAIGHT, Mounting Technology=Board, MP=M20-9980245, Number of Contacts=4, Number of Rows Loaded=1, Option="General Purpose", Pin Count=4, Price=None, Reach SVHC Compliant=Yes, RoHS Compliant=Yes, Source=M20-9980245.SchLib, Terminal Pitch=2.54mm, Termination=Solder
J?2 J?3 J?5: library part CMP-00000-10, "Connector Header Through Hole 2 position 0.100\" (2.54mm)", Case/Package=SIL, Color=Black, Contact Resistance=30mR, Current Rating=3A, Insulation Resistance=10GR, JLCPCB Part No.=C3332353, Max Operating Temperature=105°C, Min Operating Temperature=-40°C, Package Quantity=1000, Voltage Rating (AC)=750V, Contact Material=Bronze,Brass, Contact Mating Length=0.24inch, Contact Plating=Tin, Contact Type="Male Pin", Depth=2.54mm, Gender=Male, Housing Color=Black, Housing Material=Nylon, Length=5.08mm, Max Current Rating=3A, Mount="Through Hole", Number of Contacts=2, Number of Positions=2, Number of Rows=1, Orientation=Straight, Packaging=Bulk, Pitch=2.54mm, Radiation Hardening=No, Reach SVHC Compliant=No, Series=M20, Termination=Solder
LS1: library part CMP-2000-05252-2, "AUDIO PIEZO TRANSDUCER 12.5V SMD", Frequency=4kHz, Max Operating Temperature=85°C, Max Supply Voltage (DC)=12.5V, Min Operating Temperature=-40°C, Min Supply Voltage (DC)=-12.5V, Package Quantity=2000, Voltage Rating=1.5V, Depth=9mm, Height=1.9mm, Lead Free="Lead Free", Length=9mm, Mount="Surface Mount", Packaging="Tape and Reel", Radiation Hardening=No, REACH SVHC="No SVHC", Self Resonant Frequency=4kHz, Termination=Solder, Voltage Rating (DC)=12.5V, Width=9mm
P1 P3: library part CMP-2000-07077-1, "Male Header, Pitch 1 mm, 1 x 3 Position, Height 2.9 mm, -25 to 85 degC, RoHS, Tape and Reel", Manufacturer=JST, Package Description="Male Header, Pitch 1 mm, 1 x 3 Position, Height 2.9 mm", Package Reference=SM03B-SRSS-TB, Datasheet URL=https://datasheet.ciiva.com/26894/getdatasheetpartid-708885-26894671.pdf, Datasheet Version=11/2010, Manufacturer URL=http://www.jst.com/home2.html, Mounting Technology=SurfaceMount, No of Positions=3, Pitch=1mm, Style/Orientation=RightAngleHeader/Plug, Termination=Crimp, Type=ShroudedHeader
P2 P4: library part CMP-2000-05164-1, "Male Header, Pitch 2 mm, 1 x 3 Position, Height 6 mm, Tail Length 3.4 mm, -25 to 85 degC, RoHS, Bulk", Manufacturer=JST, Datasheet URL=https://datasheet.ciiva.com/11746/0900766b80826550-11746939.pdf, Datasheet Version=Oct-06, Manufacturer URL=http://www.jst.com/home2.html, No of Positions=3, Pitch=2mm, Style/Orientation=StraightHeader/Plug, Termination=Crimp, Type=ShroudedHeader
R1: library part CMP-2001-04320-1, Manufacturer="Vishay Dale", Part Number=PNM0805E5001BST5
R2: library part CMP-00347-47553138-1, "Res Thin Film 0603 250 Ohm 0.01% 0.1W(1/10W) ±5ppm/°C Pad SMD T/R Automotive AEC-Q200", Case Code (Imperial)=0603, Case Code (Metric)=1608, Max Operating Temperature=155°C, Max Power Dissipation=100mW, Min Operating Temperature=-55°C, Power Rating=63mW, Resistance=250Ω, Temperature Coefficient=5ppm/°C, Tolerance=0.01%, Case/Package=0603, ComponentLink1Description="Manufacturer's Website", ComponentLink1URL=http://www.seielect.com, ComponentLink2Description="Datasheet URL", ComponentLink2URL=https://www.seielect.com/catalog/sei-rncf.pdf, Composition="Thin Film", Features="Moisture Resistant", Height=558.8µm, HelpURL=https://www.seielect.com/catalog/sei-rncf.pdf, Length=1.6002mm, Mount="Surface Mount", Number of Terminations=2, RoHS=Compliant, Schedule B="8533210045, 8533210045", Width=787.4µm
R3: library part CMP-027-000028-7, "0 Ohms Jumper Chip Resistor 0603 (1608 Metric) Moisture Resistant Thick Film", Case/Package=0603, JLCPCB Part No.=C95177, Max Operating Temperature=155°C, Min Operating Temperature=-55°C, Package Height=0.45mm, Package Length=1.6mm, Package Shape=Rectangular, Package Width=0.8mm, Power=100mW, Rated Temperature=70°C, Resistor Type="FIXED RESISTOR", Construction=Chip, JESD-609 Code=e3, Mounting Technology="Surface Mount", Packaging="Tape and Reel", Pins=2, Reach SVHC Compliant=Yes, RoHS Compliant=Yes, Technology="METAL GLAZE/THICK FILM", Terminal Finish=Nickel, Termination=Wraparound
R4 R8 R9 R11: library part CMP-00013-14, "10 kOhms ±1% 0.1W, 1/10W Chip Resistor 0603 (1608 Metric) Moisture Resistant Thick Film", Case/Package=0603, JLCPCB Part No.=C98220, Max Operating Temperature=155°C, Min Operating Temperature=-55°C, Package Height=0.45mm, Package Length=1.6mm, Package Shape=Rectangular, Package Style=SMTMeter, Package Width=0.8mm, Power=100mW, Rated Temperature=70°C, Resistor Type="FIXED RESISTOR", Temperature Coefficient=100ppm/°C, Tolerance=1%, Working Voltage=75V, Additional Feature="LASER TRIMMABLE", Construction=Chip, JESD-609 Code=e3, Mounting Technology="Surface Mount", Packaging="Tape and Reel", Pins=2, Reach SVHC Compliant=Yes, RoHS Compliant=Yes, Technology="METAL GLAZE/THICK FILM", Terminal Finish=Nickel, Termination=Wraparound
R5: library part CMP-2003-03976-1, Manufacturer=Yageo, Part Number=RC1206JR-073KL
R6 R13 R14: library part CMP-019-000000-15, "1 kOhms ±1% 0.1W, 1/10W Chip Resistor 0603 (1608 Metric) Moisture Resistant Thick Film", Case/Package=0603, JLCPCB Part No.=C22548, Max Operating Temperature=155°C, Min Operating Temperature=-55°C, Package="2012 Rohm Semiconductor", Package Height=0.45mm, Package Length=1.6mm, Package Shape=Rectangular, Package Style=SMTMeter, Package Width=0.8mm, Power=100mW, Rated Temperature=70°C, Resistor Type="FIXED RESISTOR", Temperature Coefficient=100ppm/°C, Tolerance=1%, Working Voltage=75V, Additional Feature="LASER TRIMMABLE", Availability="In Stock", Check_prices=https://www.snapeda.com/parts/RC0805FR-071KL/Yageo/view-part/?ref=eda, Component Type=Standard, Construction=Chip, Design Item ID=RC0805FR-071KL, JESD-609 Code=e3, MF=Yageo, Mounting Technology="Surface Mount", MP=RC0805FR-071KL, Packaging="Tape and Reel", Pin Count=2, Pins=2, Price=None, Purchase-URL=https://pricing.snapeda.com/search/part/RC0805FR-071KL/?ref=eda, Reach SVHC Compliant=Yes, RoHS Compliant=Yes, SnapEDA_Link=https://www.snapeda.com/parts/RC0805FR-071KL/Yageo/view-part/?ref=snap, Source=RC0805FR-071KL.SchLib, Technology="METAL GLAZE/THICK FILM", Terminal Finish=Nickel, Termination=Wraparound
R7: library part CMP-027-000005-7, "2.2 kOhms ±1% 0.1W, 1/10W Chip Resistor 0603 (1608 Metric) Moisture Resistant Thick Film", JLCPCB Part No.=C114662
R10 R12: library part CMP-00062-2, "Res Thick Film 1.6 x 0.8 mm 4.7K Ohm 1% 0.1W(1/10W) 100ppm/ C Molded SMD Paper T/R", JLCPCB Part No.=C99782
S*1 S*2 S*3 S*4: library part CMP-00045-5, "Standard sized M3 screw mounting hole"
U1: library part CMP-12105-000139-1, "IC MCU 32BIT 512KB FLASH 64LQFP", Case/Package=LQFP, Frequency=216MHz, Max Operating Temperature=85°C, Min Operating Temperature=-40°C, Core Architecture=ARM, Interface=I2C, Memory Size=512KB, Memory Type=FLASH, Mount="Surface Mount", Number of I/Os=50, Oscillator Type=Internal, Packaging=Tray, Peripherals="Brown-out Detect/Reset"
U2: library part CMP-2000-07604-2, "IC REG LINEAR 3.3V 300MA SOT23-5", Case/Package=SOT-23-5, Dropout Voltage=380mV, Max Input Voltage=5.5V, Max Operating Temperature=125°C, Max Output Current=300mA, Min Input Voltage=2.5V, Min Operating Temperature=-40°C, Nominal Output Voltage=3.3V, Operating Supply Current=42uA, Power Supply Rejection Ratio (PSRR)=60dB, Quiescent Current=38uA, Accuracy=3%, Height=1.1mm, Length=2.9mm, Mount="Surface Mount", Number Of Outputs=1, Number of Pins=5, Output Current=300mA, Output Type=Fixed, Output Voltage=3.3V, Packaging="Tape and Reel", REACH SVHC="No SVHC", Width=1.6mm
U3: library part CMP-2000-05076-3, "SENSOR PRESSURE ABS", Case/Package=SMD/SMT, Max Operating Temperature=85°C, Min Operating Temperature=-40°C, Operating Pressure=15.95PSI, Lead Free="Lead Free", Max Pressure=290.08PSI, Number of Pins=8, Output Type=SPI, Port Style="No Port", Pressure Type=Absolute, Termination=SMD/SMT
U4: library part CMP-2000-07589-1, "High Performance 6-Axis MEMS MotionTracking(TM) Device, 1.71 to 3.45 V, -40 to 85 degC, 16-Pin LGA, RoHS", Manufacturer=InvenSense, Max Operating Temperature=85degC, Min Operating Temperature=-40degC, Package Description="16-Pin Land Grid Array, Body 3 x 3 mm, Pitch 0.5 mm", Package Reference=I62-16, Datasheet URL=http://www.invensense.com/wp-content/uploads/2016/10/DS-000176-ICM-20602-v1.0.pdf, Datasheet Version="Rev. 1.0, 10/2016", Manufacturer URL=http://www.invensense.com/, Mounting Technology=SurfaceMount, Output Type=I2C, RoHSCompliant=True, Sensor Type=Temperature
Y1: library part CMP-27762-006537-2, "Crystal 16MHz ±20ppm (Tol) ±30ppm (Stability) 18pF FUND 80Ω 4-Pin SMD T/R", Case/Package=CSMD, ESR (Equivalent Series Resistance)=80R, Frequency=16MHz, Frequency Stability=30ppm, Frequency Tolerance=20ppm, Load Capacitance=18pF, Max Operating Temperature=85°C, Min Operating Temperature=-40°C, Operating Frequency="16 MHz", Package Quantity=1000, Depth=2.5mm, Height=1mm, Lead Free="Lead Free", Length=3.2mm, Mount="Surface Mount", Number of Pins=4, Packaging="Tape and Reel", Radiation Hardening=No, Series=ABM8G, Series Resistance=80R, Termination=SMD/SMT, Tolerance=20ppm, Width=2.5mm

## Via types
v1: diameter 0.3, hole 0.25, SIGNAL to SIGNAL II, 13 vias
v2: diameter 1.27, hole 0.711, SIGNAL to SIGNAL II, 9 vias
v3: diameter 0.45, hole 0.45, SIGNAL to SIGNAL II, 4 vias
v4: diameter 0.635, hole 0.356, SIGNAL to SIGNAL II, 2 vias

## Nets (pads, with @x,y where several pads share a name; then routed paths per layer and width w, separated by ;. In a path a pad name is that pad's centre, name@x,y a point inside that pad or via, vN(x,y) a via of type N, cw(c..) or ccw(c..) an arc to the next point about the centre after c; other vN are vias at no path point)
+5: C18.1 D5.1 J4.1 | length 8.3
  SIGNAL II w0.254: C18.1@109.857,77.597 107.714,77.597 D5.1 107.696,77.165 108.444,76.417 111.265,76.417 111.91,75.772 J4.1
BOOTLED: *1.1 R6.1 R8.2 U1.60 | length 5.1
  SIGNAL w0.254: R6.1@106.973,108.432 R6.1 107.595,108.458 107.958,108.821 107.958,108.896 108.256,109.194 R8.2 108.331,108.496 108.575,108.252 109.586,108.252 109.896,107.943 109.896,107.092 U1.60
CAM_ANALOG: P1.2
ESC_CURRENT_SENSE: J2.8 U1.10 | length 27.7
  SIGNAL w0.254: U1.10 105.977,100.629 106.827,100.629 107.137,100.319 107.137,96.851 107.07,96.783 107.07,94.614 107.137,94.547 107.137,92.806 106.766,92.436 106.766,91.352 105.41,89.996 105.41,76.962 106.232,76.14 106.232,75.233 J2.8
GND: C1.2 C2.2 C3.2 C4.2 C5.2 C6.2 C7.2 C8.2 C9.2 C10.2 C11.2 C12.2 C13.2 C14.2 C15.1 C16.2 C17.2 C18.2 D1.1 D2.1 D3.1 D4.1 J1.2 J2.1 J3.2 J4.5 J5.6 J5.9 J5.11 J5.13 J5.14 LS1.2 P1.3 P2.3 P3.3 P4.3 R2.1 R8.1 U1.12 U1.18 U1.31 U1.47 U1.63 U2.2 U3.1 U3.2 U3.5 U3.7 U4.8 U4.13 Y1.2 Y1.4 | length 19.5
  SIGNAL w0.254: P2.3 P2.3@92.895,93.742 ; P1.3 P1.3@94.623,101.989 ; v2@95.742,93.742 v2(95.758,93.726) ; v2@96.258,101.989 v2(96.266,101.981) ; J1.2 102.727,86.336 102.727,89.392 v2(102.743,89.408) ; J2.1 115.281,75.258 115.281,76.673 v2(115.443,76.835) ; v2(119.634,79.121) 119.65,79.137 119.65,82.027 J3.2 ; v2(126.746,97.917) 126.762,97.901 129.27,97.901 P4.3 ; P3.3 127.352,104.259 128.883,104.259 129.159,104.535 v2(129.159,107.061)
  SIGNAL w0.5: P2.3@92.895,93.742 v2@95.742,93.742 ; P1.3@94.623,101.989 v2@96.258,101.989
  other v1: 102.489,89.408
IMU_INT: U1.61 U4.6 | length 20.3
  SIGNAL w0.254: U1.61 109.407,106.327 109.524,106.211 109.524,106.185 110.409,105.299 116.227,105.299 116.451,105.523 116.953,105.523 v1(118.745,107.315)
  SIGNAL II w0.254: v1(118.745,107.315) 118.745,107.303 118.458,107.016 118.458,105.666 121.047,103.077 121.047,102.427 121.047,102.077 121.18,101.944 121.504,101.944 121.779,101.669 122.893,101.669 123.026,101.802 123.026,101.877 123.174,102.025 U4.6
M1_PWM: J2.3 J?4.2 U1.41 | length 44.1
  SIGNAL w0.254: J2.3 112.759,75.236 112.759,77.199 113.665,78.105 116.271,78.105 117.254,77.122 117.254,74.275 117.56,73.969 119.054,73.969 J?4.2 ; U1.41 117.359,101.651 118.415,101.651 v1(118.745,101.981)
  SIGNAL II w0.254: v1(118.745,101.981) 119.277,101.449 119.277,100.997 120.468,99.806 120.468,93.654 121.744,92.378 121.744,81.183 119.253,78.692 J?4.2
M2_PWM: J2.4 J?4.4 U1.42 | length 46.6
  SIGNAL w0.254: J2.4 111.369,76.952 113.33,78.913 117.048,78.913 J?4.4 ; U1.42 117.359,102.151 118.311,102.151 118.568,102.408 118.646,102.408 118.744,102.506 v1(118.756,102.506)
  SIGNAL II w0.254: v1(118.756,102.506) 118.769,102.506 118.867,102.408 118.922,102.408 119.628,101.702 119.628,101.605 119.631,101.602 119.631,101.49 120.593,100.528 120.705,100.528 120.872,100.361 120.872,100.33 120.904,100.298 120.904,98.549 122.148,97.305 122.148,81.015 121.793,80.66 J?4.4
M3_PWM: J2.5 J?4.1 U1.43 | length 63.3
  SIGNAL w0.254: J2.5 110.674,75.096 110.792,74.978 110.792,74.131 110.954,73.969 111.784,73.969 111.994,74.179 111.994,77.005 113.498,78.509 116.439,78.509 120.332,74.615 120.332,74.102 121.346,73.088 121.859,73.088 122.872,72.075 122.872,71.181 122.24,70.549 120.332,70.549 J?4.1 ; U1.43 117.359,102.651 118.24,102.651 118.401,102.812 118.442,102.812 118.63,103 118.744,103 v1(118.753,103.009)
  SIGNAL II w0.254: v1(118.753,103.009) 118.761,103 118.901,103 119.985,101.916 119.985,101.637 120.74,100.882 120.923,100.882 121.276,100.529 121.276,100.497 121.308,100.465 121.308,99.432 121.426,99.314 122.491,99.314 122.872,98.932 122.872,73.721 122.164,73.012 120.637,73.012 J?4.1
M4_PWM: J2.6 J?4.3 U1.44 | length 51.1
  SIGNAL w0.254: J2.6 109.424,75.096 109.542,74.978 109.542,74.131 110.25,73.423 118.471,73.423 118.885,73.009 120.412,73.009 J?4.3 ; U1.44 118.102,103.14 118.168,103.207 118.224,103.207 118.233,103.216 118.275,103.216 118.561,103.502 118.74,103.502 v1(118.749,103.511)
  SIGNAL II w0.254: v1(118.749,103.511) 118.758,103.502 118.97,103.502 120.339,102.134 120.339,101.784 120.887,101.236 121.14,101.236 123.276,99.1 123.276,73.554 122.91,73.187 122.91,72.745 J?4.3
MBUS: P3.1 U1.52 | length 20.3
  SIGNAL w0.254: U1.52 113.918,107.07 113.918,106.219 114.485,105.653 115.454,105.653 115.678,105.877 116.647,105.877 119.476,108.706 121.752,108.706 121.914,108.544 121.914,106.448 122.063,106.299 123.296,106.299 124.372,105.223 124.775,105.223 124.908,105.09 124.908,104.687 126.342,103.253 126.342,102.857 126.475,102.724 126.547,102.724 126.696,102.575 126.696,102.424 126.869,102.251 P3.1
MCU_BUZZER: LS1.1 U1.36 | length 3.6
  SIGNAL w0.254: U1.36 118.426,99.14 v1(119.244,99.958)
  SIGNAL II w0.254: LS1.1 118.721,99.06 119.244,99.583 v1(119.244,99.958)
MCU_LED: R14.1 U1.35 | length 2.2
  SIGNAL w0.254: U1.35 118.102,98.64 118.141,98.679 R14.1
MISO: J5.7 J?1.1 R9.1 U1.22 | length 41
  SIGNAL w0.254: v1(108.709,93.856) 109.585,93.856 109.588,93.853 R9.1 109.803,93.993 110.396,94.586 110.396,95.688 U1.22
  SIGNAL II w0.254: J?1.1 98.742,72.581 98.742,87.127 106.103,94.488 108.077,94.488 108.712,93.853 109.642,94.783 J5.7
MOSI: J5.3 J?1.3 R11.1 U1.23 | length 63.4
  SIGNAL w0.254: U1.23 110.907,94.211 R11.1 111.423,94.291 111.834,94.291 111.937,94.394 v1(111.949,94.394)
  SIGNAL II w0.254: J?1.3 102.428,71.567 102.428,72.581 103.441,73.594 103.441,76.597 100.633,79.405 100.633,83.235 101.641,84.243 110.786,84.243 111.949,85.406 v1(111.949,94.394) 111.565,94.778 111.565,94.966 113.516,96.917 113.516,101.847 111.547,103.815 103.38,103.815 102.409,102.845 102.409,101.117 102.572,100.955 104.609,100.955 105.242,101.587 J5.3
NetC9_1: C6.1 U1.30 | length 0
  SIGNAL w0.254: C6.1@113.264,92.563 C6.1
NetC10_1: C2.1 R4.1 U1.7 | length 9.7
  SIGNAL w0.254: R4.1 103.378,105.609 103.342,105.573 106.974,105.573 107.137,105.411 107.137,102.461 106.827,102.151 105.977,102.151 U1.7
NetC11_1: C17.1 U4.14 | length 0.9
  SIGNAL II w0.254: U4.14 C17.1
NetD1_2: D4.2 R14.2 | length 1.5
  SIGNAL w0.254: D4.2 R14.2
NetD3_2: D2.2 R7.2 | length 1.4
  SIGNAL w0.254: D2.2 R7.2
NetD4_2: D1.2 R6.2 | length 2.1
  SIGNAL w0.254: D1.2@104.013,108.458 D1.2 105.143,108.712 R6.2
NetD5_2: D3.2 R13.2 | length 1.8
  SIGNAL w0.254: R13.2 D3.2
NetR3_1: R3.1 U1.6 | length 5.4
  SIGNAL w0.254: R3.1 104.696,100.076 104.844,100.225 104.844,102.299 105.069,102.523 105.095,102.523 105.212,102.64 U1.6
NetR10_2: R2.2 R5.1 | length 2.3
  SIGNAL w0.254: R2.2 R2.2@101.105,95.121
  SIGNAL w0.5: R2.2@101.105,95.121 R5.1
OSC_IN: C1.1 U1.5 Y1.1 | length 10.5
  SIGNAL w0.254: C1.1 100.457,101.977 Y1.1 100.61,102.13 101.419,102.13 101.419,103.018 101.427,103.026 101.427,104.068 101.906,104.547 104.266,104.547 104.6,104.213 104.6,103.289 104.749,103.14 U1.5
OSC_OUT: C3.1 R3.2 Y1.3 | length 5.2
  SIGNAL w0.254: R3.2 101.333,101.014 101.773,101.454 101.773,102.714 101.781,102.722 101.781,102.901 102.6,103.72 Y1.3 102.741,103.761 103.632,103.761
SCK: J5.5 J?1.2 U1.21 | length 62.6
  SIGNAL w0.254: v1(108.717,93.294) 108.72,93.291 110.212,93.291 110.236,93.267 111.716,93.267 111.921,93.473 112.089,93.473 112.207,93.354 112.207,91.118 112.369,90.956 114.199,90.956 114.66,91.417 114.66,93.801 115.121,94.262 115.321,94.262 115.84,94.781 115.84,96.616 115.586,96.87 110.227,96.87 109.918,96.561 109.918,95.71 U1.21
  SIGNAL II w0.254: J?1.2 99.822,86.369 100.207,86.754 100.207,88.091 106.2,94.084 107.819,94.084 108.477,93.426 108.572,93.426 108.705,93.294 v1(108.717,93.294) ; J5.5 107.442,102.889 107.56,103.007 111.212,103.007 111.375,102.845 111.375,100.578 111.161,100.364 111.161,95.705 108.929,93.473 108.909,93.473 108.732,93.296 v1@108.732,93.279
SCL: J?3.1 R12.1 U1.58 U3.4 U4.2 | length 43.6
  SIGNAL w0.254: U1.58 110.907,108.416 111.685,109.194 R12.1 111.793,109.161 113.484,109.161 113.547,109.099 115.83,109.099 J?3.1
  SIGNAL II w0.254: J?3.1 115.83,109.099 113.956,109.099 113.29,109.765 113.29,110.707 114.36,111.777 118.109,111.777 119.341,110.546 119.341,109.937 120.572,108.706 122.242,108.706 124.268,106.68 125.353,106.68 127.064,104.969 127.064,104.255 126.559,103.75 124.599,103.75 124.553,103.796 124.164,103.796 U4.2 ; 124.164,103.794 124.784,103.174 124.784,96.215 124.622,96.053 124.53,96.053 124.332,95.855 U3.4
SD_CS: J5.2 J?1.4 U1.20 | length 51.6
  SIGNAL w0.254: v1(107.95,93.218) 107.95,93.24 107.541,93.649 107.541,94.714 107.474,94.781 107.474,96.616 107.727,96.87 109.086,96.87 109.396,96.561 109.396,95.71 U1.20
  SIGNAL II w0.254: J?1.4 100.229,76.174 100.229,83.402 100.611,83.784 100.611,87.088 102.069,88.546 103.1,88.546 105.387,90.832 105.387,90.981 107.673,93.268 107.714,93.227 107.941,93.227 108.305,92.863 108.891,92.863 110.335,94.307 111.565,95.537 111.565,100.196 111.779,100.41 111.779,103.012 111.38,103.411 104.779,103.411 104.142,102.775 J5.2
SDA: J?3.2 R10.1 U1.59 U3.3 U4.3 | length 33.4
  SIGNAL w0.254: U1.59 110.396,107.092 110.396,108.205 110.109,108.492 R10.1 110.184,109.194 111.032,110.042 114.233,110.042 J?3.2
  SIGNAL II w0.254: J?3.2 115.564,111.373 117.942,111.373 118.104,111.211 118.104,105.495 120.693,102.906 120.693,102.28 120.693,101.93 121.033,101.59 121.357,101.59 123.73,99.217 ; U4.3 123.901,103.294 124.093,103.294 124.351,103.036 124.351,99.838 123.73,99.217 ; U3.3 124.209,96.553 124.134,96.553 123.984,96.703 123.892,96.703 123.73,96.865 123.73,99.217
SERVO_1: J?5.1 P2.1 U1.37 | length 40.4
  SIGNAL w0.254: U1.37 118.102,99.64 118.168,99.707 118.265,99.707 118.519,99.961 118.519,100.426 118.769,100.676 v4(118.769,100.735) v4@119.056,100.735 ; v4@118.913,100.592 v4@119.056,100.735 ; J?5.1 120.044,106.836 120.044,106.747 120.015,106.718 120.015,101.981 119.126,101.092 119.056,101.022 v4@119.056,100.735
  SIGNAL II w0.254: P2.1 92.946,97.825 93.761,97.825 100.155,104.219 111.714,104.219 112.048,103.886 115.888,103.886 117.292,102.482 117.292,102.212 v4(118.769,100.735)
SERVO_2: J?5.2 P4.1 U1.38 | length 42.2
  SIGNAL w0.254: U1.38 117.337,100.129 116.486,100.129 116.177,99.819 116.177,97.357 117.061,96.473 117.061,94.01 118.767,92.304 124.564,92.304 126.145,93.885 128.054,93.885 ; v4(127.035,94.904) 128.054,93.885 ; P4.1 128.054,93.885
  SIGNAL II w0.254: J?5.2 121.776,109.11 122.339,109.11 124.415,107.034 125.5,107.034 128.117,104.416 128.117,95.986 v4(127.035,94.904)
SWCLK: U1.49
SWDIO: U1.46
SWO: U1.55
USB_D_N: J4.2 U1.29 | length 28.8
  SIGNAL w0.254: v1(113.862,94.271) 113.862,94.283 113.907,94.328 U1.29
  SIGNAL II w0.254: J4.2 111.162,75.021 111.162,75.678 110.95,75.89 108.95,75.89 106.829,75.89 106.544,76.175 106.544,79.055 106.706,79.217 107.59,79.217 113.919,85.546 v1@113.919,94.361
USB_D_P: J4.3 U1.33 | length 31.1
  SIGNAL w0.254: U1.33 118.456,97.64 118.479,97.663 v1(118.491,97.663)
  SIGNAL II w0.254: J4.3 110.708,74.825 110.708,74.168 111.09,73.786 113.925,73.786 116.203,76.065 116.203,95.375 v1(118.491,97.663)
V_MON: R1.2 R5.2 U1.15 | length 4.9
  SIGNAL w0.254: R1.2 R5.2 103.409,98.14 U1.15
VCC: C4.1 D5.2 J1.1 J3.1 J?2.1 P2.2 P3.2 P4.2 R1.1 R7.1 U2.1 | length 6.2
  SIGNAL w0.254: R7.1 107.468,89.382 J?2.1 ; C4.1 C4.1@112.908,82.047
  SIGNAL w0.5: C4.1@112.908,82.047 U2.1
  SIGNAL w1: v2(107.569,87.249) J?2.1
VDD: *1.2 C5.1 C7.1 C8.1 C9.1 C10.1 C11.1 C12.1 C14.1 C16.1 J2.2 J5.4 J?2.2 P1.1 R4.2 R9.2 R10.2 R11.2 R12.2 R13.1 U1.1 U1.13 U1.19 U1.32 U1.48 U1.64 U2.5 U3.8 U4.16 | length 18.6
  SIGNAL w0.254: P1.1 94.623,104.005 96.258,104.005 v3(96.266,104.013) ; v3(100.965,107.188) R4.2 ; J?2.2 J?2.2@110.193,89.281 ; R10.2 v3(110.109,111.76) ; R12.2 v3(111.76,111.76) ; C5.1@112.877,87.783 C5.1 C5.1@112.908,87.752 ; J2.2 J2.2@113.894,75.121 ; v2@113.894,76.81 v2(113.919,76.835) ; 121.28,97.917 121.288,97.925 ; 122.726,97.925 122.733,97.932 ; C8.1 124.554,97.569 124.554,96.974 124.714,96.814
  SIGNAL w0.5: J?2.2@110.193,89.281 110.955,90.043 R13.1 C5.1@112.877,87.783 ; U2.5 C5.1@112.908,87.752 ; C7.1 124.714,96.814
  SIGNAL w1: J2.2@113.894,75.121 v2@113.894,76.81
  SIGNAL II w0.254: U4.16 123.174,104.567 123.571,104.964 C16.1 ; U3.8 125.865,97.797 126.866,97.797 C14.1
VDDIO: C13.1 C15.2 U3.6 U4.1 | length 2.3
  SIGNAL w0.254: 121.285,96.52 121.306,96.52 121.418,96.632
  SIGNAL II w0.254: U4.1 123.945,104.296 123.974,104.267 C15.2 ; U3.6 125.865,96.512 126.868,96.512 C13.1
pads on no net: J1. J2.7 J2.9 J2.10 J3. J4.4 J4.6 J4.7 J4.8 J4.9 J4.10 J4.11 J5.1 J5.8 J5.10 J5.12 P1.MP1 P1.MP2 P3.MP1 P3.MP2 S*1.0 S*2.0 S*3.0 S*4.0 U1.2 U1.3 U1.4 U1.8 U1.9 U1.11 U1.14 U1.16 U1.17 U1.24 U1.25 U1.26 U1.27 U1.28 U1.34 U1.39 U1.40 U1.45 U1.50 U1.51 U1.53 U1.54 U1.56 U1.57 U1.62 U2.3 U2.4 U4.4 U4.5 U4.7 U4.9 U4.10 U4.11 U4.12 U4.15

## Polygon pours and split planes (outlines as drawn)
VCC on POWER "VCC_L03_P010" (solid, pour order 10): 131.508,96.763 131.508,106.426 126.238,106.426 126.174,88.265 122.237,88.265 122.237,76.073 130.238,76.073 131.508,77.343
VDD on POWER "VDD_L03_P003" (solid, pour order 3): 97.155,90.043 125.984,90.043 125.984,113.411 97.155,113.411
VCC on POWER "VCC_L03_P002" (solid, pour order 2): 100.076,88.265 122.682,88.265 122.682,78.105 100.076,78.232
VCC on POWER "VCC_L03_P009" (solid, pour order 9): 91.186,96.774 95.758,96.774 96.52,96.012 96.52,88.265 100.457,88.265 100.457,76.073 92.456,76.073 91.186,77.343
VDD on POWER "VDD_L03_P011" (solid, pour order 11): 93.599,103.378 99.695,103.378 99.822,103.505 99.822,106.426 93.599,106.426
GND on GND "GND_L02_P004" (solid, pour order 4): 89.535,113.792 132.461,113.792 132.461,69.723 132.588,69.596 89.408,69.596

## Silkscreen, mask and mechanical layers (free items; w line width, h text height)
Mechanical 1:
  lines w0.254: 89.535,113.723 89.535,69.723 132.535,69.723 132.535,113.723 ; 89.535,113.792 132.535,113.792 ; 95.631,72.39 ccw(c95.631,72.517) 95.758,72.517 ; 95.738,109.982 cw(c95.738,109.962) 95.758,109.962

## Dimensions
89.535,113.723 to 132.535,113.792 on Mechanical 1
95.738,109.982 to 126.238,109.982 on Mechanical 1

## Text inside footprints (layer, text, board x,y; h text height)
*1: Top 3D Body "RefDes2" at 101.08,111.125 h1.27; Top 3D Body "RefDes2" at 101.169,111.119 h1.27; Top Overlay "RefDes" at 101.398,111.125 h1.27; Top Overlay "REFDES" at 101.08,111.125 h1.27; Top Overlay "RefDes" at 101.486,111.119 h1.27; Top Overlay "REFDES" at 101.169,111.119 h1.27
J5: Bottom 3D Body "RefDes2" at 108.188,103.703 h1.27; Bottom Overlay "RefDes" at 107.87,103.703 h1.27; Bottom Overlay "REFDES" at 108.188,103.703 h1.27